# Altium PCB isa_opl2.PcbDoc
Units mm, origin at the board's own origin, x right, y up, seen from the top; angles counter-clockwise.
Board outline 104.14 x 73.66 mm, 2 copper layers (Front, Back); 61 components, 97 nets, 285 pads, 18 vias.
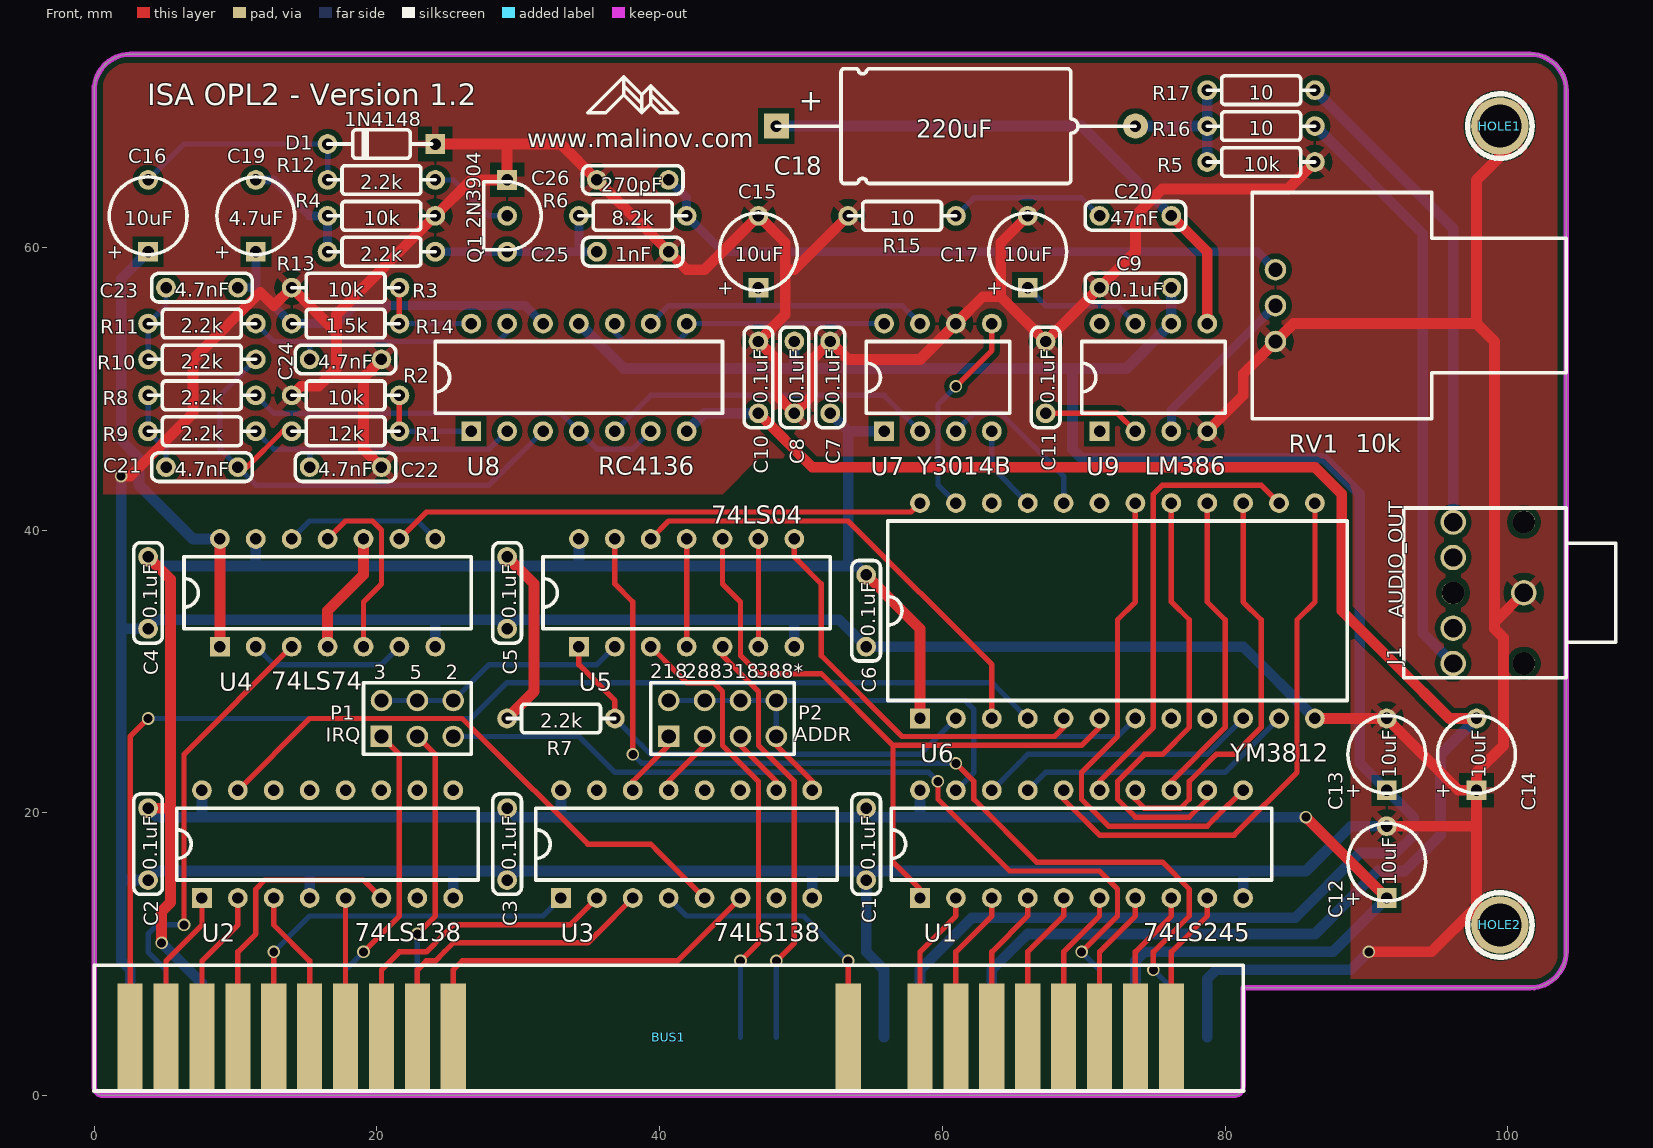
[diagram p0: Front view]
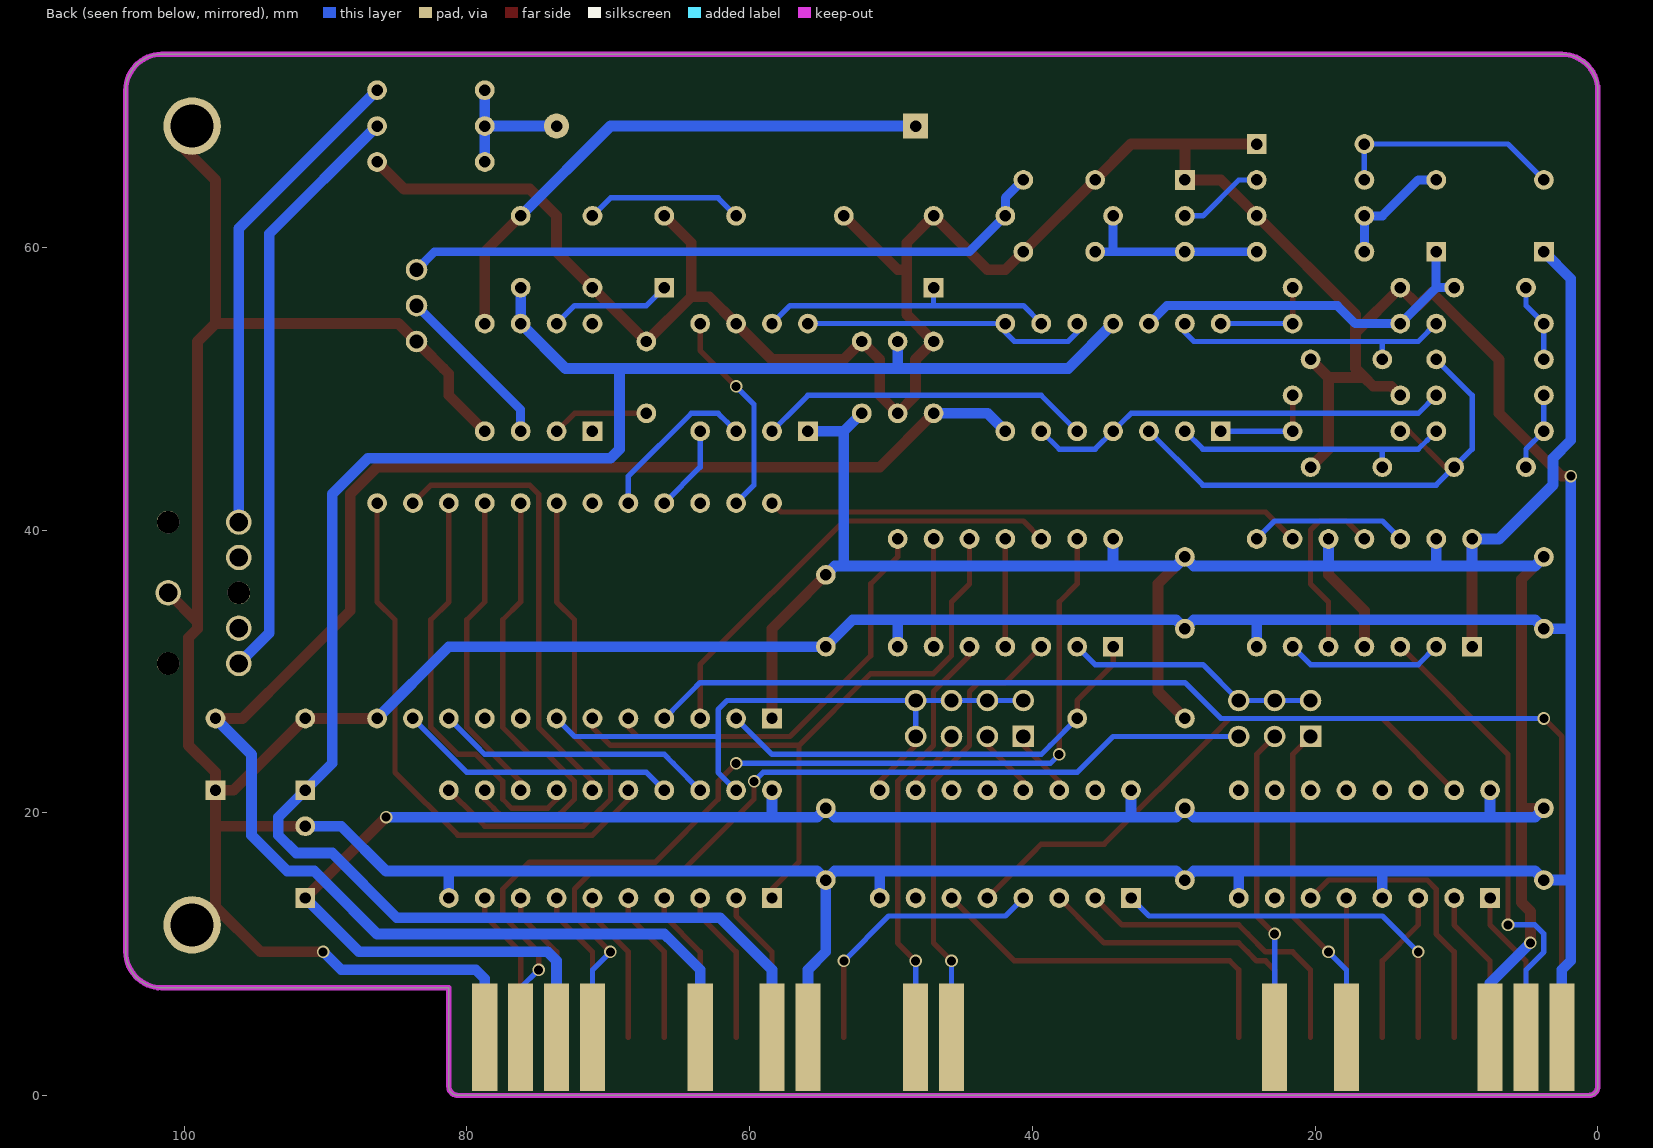
[diagram p1: Back view, seen from below]

## Layer stack, top to bottom
F.Mask: solder mask 0.0102, Solder Resist, Dk 3.5
Front: signal copper 0.0356
Dielectric 1: dielectric 0.32, FR-4, Dk 4.8
Back: signal copper 0.0356
B.Mask: solder mask 0.0102, Solder Resist, Dk 3.5

## Board outline
0,0.635 0,71.12 cw(c2.54,71.12) 2.54,73.66 101.6,73.66 cw(c101.6,71.12) 104.14,71.12 104.14,10.16 cw(c101.6,10.16) 101.6,7.62 81.28,7.62 81.28,0.635 cw(c80.645,0.635) 80.645,0 0.635,0 cw(c0.635,0.635) 0,0.635

## Design rules (kind name [scope] priority, off if disabled: settings)
Clearance "Clearence 0.37846_Polygon" [InNamedPolygon('Front-GND')] p1: gap=0.378 ignorepadtopadclearanceinfootprint=FALSE
Clearance "Clearence 0.254_NetClass" [InNetClass('Default') OR InNetClass('Audio') OR InNetClass('Power') OR InNetClass('PwrAudio')] p2: gap=0.254 ignorepadtopadclearanceinfootprint=FALSE
HoleSize "Hole Size (Default)" [All] p1: absolutevalues=TRUE maxlimit=10 minlimit=0.508 maxpercent=80.000 minpercent=20.000
MinimumSolderMaskSliver [All] p1: minsoldermaskwidth=0
PolygonConnect Polygon_Front-GND_ConnectDirect [IsNamedPolygon('Front-GND') vs IsVia] p1: connectstyle=Direct reliefconductorwidth=0.254 reliefentries=4 polygonreliefangle="90 Angle" airgapwidth=0.254
PolygonConnect Polygon_Front-GND_ConnectRelief45 [IsNamedPolygon('Front-GND') vs (IsThruPin or IsSMTPin) and (PadShape_AllLayers = 'Round')] p2: connectstyle=Relief reliefconductorwidth=0.508 reliefentries=4 polygonreliefangle="45 Angle" airgapwidth=0.508
PolygonConnect Polygon_Front-GND_ConnectRelief90 [IsNamedPolygon('Front-GND') vs (IsThruPin or IsSMTPin) and (PadShape_AllLayers <> 'Round')] p3: connectstyle=Relief reliefconductorwidth=0.508 reliefentries=4 polygonreliefangle="90 Angle" airgapwidth=0.508
RoutingVias [All] p1: holewidth=0.711 width=1.27 viastyle="Through Hole" minholewidth=0.711 minwidth=1.27 maxholewidth=0.711 maxwidth=1.27
SilkToSilkClearance [All] p1: silktosilkclearance=0
SilkToSolderMaskClearance [IsPad] p1: minsilkscreentomaskgap=0 clearancetoexposedcopper=TRUE
SolderMaskExpansion [All] p1: expansion=0.102 istentingtop=FALSE
Width [All] p1: maxlimit=10 minlimit=0.203 preferedwidth=0.378 minimp=50.000000 maximp=50.000000 favimp=50.000000
26 further rules are at their usual default settings.

## Classes and differential pairs
net class PwrAudio: AMP_OUT AUDIO_OUT LEFT RIGHT
net class Power: GND VCC VDD VSS
net class Audio: AMP_IN FILTER_OUT RC1 RC2 RC3
net class Default: 0x218 0x288 0x318 0x388 A0 A1 A2 A3 A4 A5 A6 A7 A8 A9 AEN D0 D1 D2 D3 D4 D5 D6 D7 DAC_CLK DAC_DATA DAC_SYNC DB0 DB1 DB2 DB3 DB4 DB5 DB6 DB7 I\O\R\ I\O\W\ I\R\Q\ IRQ IRQ2 IRQ3 IRQ5 MCLK Net-(C11-Pad1) Net-(C15-Pad1) Net-(C16-Pad2) Net-(C17-Pad1) Net-(C20-Pad2) Net-(C21-Pad1) Net-(C21-Pad2) Net-(C22-Pad1) Net-(C23-Pad1) Net-(C24-Pad1) Net-(J1-Pad3) Net-(J1-Pad4) Net-(Q1-Pad2) Net-(R1-Pad2) Net-(R8-Pad2) Net-(R14-Pad2) Net-(U2-Pad7) Net-(U2-Pad9) Net-(U2-Pad10) Net-(U2-Pad11) Net-(U2-Pad12) Net-(U2-Pad13) Net-(U2-Pad14) Net-(U2-Pad15) Net-(U3-Pad7) Net-(U3-Pad11) Net-(U3-Pad12) Net-(U3-Pad15) Net-(U4-Pad2) Net-(U4-Pad11) Net-(U4-Pad12) Net-(U5-Pad6) Net-(U5-Pad11) Net-(U7-Pad2) Net-(U7-Pad8) Net-(U9-Pad1) Net-(U9-Pad8) OSC R\E\A\D\ R\E\S\E\T\ RESET W\R\I\T\E\

## Components (designator, comment, footprint, x,y, rotation, side; value= is the part's Value field where it differs from the comment)
BUS1 "BUSPC" BUS_PC 40.64,4.127 r0 top
C1 "0.1uF" Cap_Cer_504 54.61,17.78 r270 top
C2 "0.1uF" Cap_Cer_504 3.81,17.78 r270 top
C3 "0.1uF" Cap_Cer_504 29.21,17.78 r270 top
C4 "0.1uF" Cap_Cer_504 3.81,35.56 r270 top
C5 "0.1uF" Cap_Cer_504 29.21,35.56 r270 top
C6 "0.1uF" Cap_Cer_504 54.61,34.29 r270 top
C7 "0.1uF" Cap_Cer_504 52.07,50.8 r90 top
C8 "0.1uF" Cap_Cer_504 49.53,50.8 r270 top
C9 "0.1uF" Cap_Cer_504 73.66,57.15 r180 top
C10 "0.1uF" Cap_Cer_504 46.99,50.8 r270 top
C11 "0.1uF" Cap_Cer_504 67.31,50.8 r90 top
C12 "10uF" Cap_Tant_504 91.44,16.51 r90 top
C13 "10uF" Cap_Tant_504 91.44,24.13 r90 top
C14 "10uF" Cap_Tant_504 97.79,24.13 r90 top
C15 "10uF" Cap_Tant_504 46.99,59.69 r90 top
C16 "10uF" Cap_Tant_504 3.81,62.23 r90 top
C17 "10uF" Cap_Tant_504 66.04,59.69 r90 top
C18 "220uF" Cap_Elec_Axial_254 60.96,68.58 r0 top
C19 "4.7uF" Cap_Tant_504 11.43,62.23 r90 top
C20 "47nF" Cap_Cer_504 73.66,62.23 r180 top
C21 "4.7nF" Cap_Cer_504 7.62,44.45 r0 top
C22 "4.7nF" Cap_Cer_504 17.78,44.45 r0 top
C23 "4.7nF" Cap_Cer_504 7.62,57.15 r0 top
C24 "4.7nF" Cap_Cer_504 17.78,52.07 r0 top
C25 "1nF" Cap_Cer_504 38.1,59.69 r180 top
C26 "270pF" Cap_Cer_504 38.1,64.77 r180 top
D1 "1N4148" Diode_762 20.32,67.31 r180 top
HOLE1 "CONN_1" HOLE_3MM 99.441,68.58 r0 top
HOLE2 "CONN_1" HOLE_3MM 99.441,12.065 r0 top
J1 "AUDIO_OUT" PHONE3_5_STEREO 104.14,35.56 r270 top
P1 "IRQ" Pin_Array_3X2 22.86,26.67 r0 top
P2 "ADDR" Pin_Array_4X2 44.45,26.67 r0 top
Q1 "2N3904" TO92_EBC_254 29.21,62.23 r270 top
R1 "12k" Res_762 17.78,46.99 r0 top
R2 "10k" Res_762 17.78,49.53 r0 top
R3 "10k" Res_762 17.78,57.15 r0 top
R4 "10k" Res_762 20.32,62.23 r0 top
R5 "10k" Res_762 82.55,66.04 r0 top
R6 "8.2k" Res_762 38.1,62.23 r180 top
R7 "2.2k" Res_762 33.02,26.67 r0 top
R8 "2.2k" Res_762 7.62,49.53 r0 top
R9 "2.2k" Res_762 7.62,46.99 r180 top
R10 "2.2k" Res_762 7.62,52.07 r0 top
R11 "2.2k" Res_762 7.62,54.61 r180 top
R12 "2.2k" Res_762 20.32,64.77 r180 top
R13 "2.2k" Res_762 20.32,59.69 r180 top
R14 "1.5k" Res_762 17.78,54.61 r0 top
R15 "10" Res_762 57.15,62.23 r180 top
R16 "10" Res_762 82.55,68.58 r180 top
R17 "10" Res_762 82.55,71.12 r180 top
RV1 "10k" BOURNS91A1 94.615,55.88 r0 top
U1 "74LS245" DIP20_300 69.85,17.78 r0 top
U2 "74LS138" DIP16_300 16.51,17.78 r0 top
U3 "74LS138" DIP16_300 41.91,17.78 r0 top
U4 "74LS74" DIP14_300 16.51,35.56 r0 top
U5 "74LS04" DIP14_300 41.91,35.56 r0 top
U6 "YM3812" DIP24_600 72.39,34.29 r0 top
U7 "Y3014B" DIP8_300 59.69,50.8 r0 top
U8 "RC4136" DIP14_300 34.29,50.8 r0 top
U9 "LM386" DIP8_300 74.93,50.8 r0 top

## Footprints (in the part's own frame and the unit in brackets; to place one, negate y for a bottom-side part, rotate by r counter-clockwise, add the part's x,y. Pads: shape width x height; smd on the part's side, far side on the other; paste and mask are expansions set on the pad)
BOURNS91A1 [mil]
  round 60 hole 40 paste-60 mask+0: 1(-435,-100) 2(-435,0) 3(-435,100)
  silkscreen extent -500,-315 375,315
BUS_PC [mil]
  rect 70x300 smd far side paste-300 mask+0: 1(1500,0) 2(1400,0) 3(1300,0) 4(1200,0) 7(900,0) 9(700,0) 10(600,0) 13(300,0) 14(200,0) 23(-700,0) 25(-900,0) 29(-1300,0) 30(-1400,0) 31(-1500,0)
  rect 70x300 smd paste-300 mask+0: 33(1400,0) 34(1300,0) 35(1200,0) 36(1100,0) 37(1000,0) 38(900,0) 39(800,0) 40(700,0) 42(500,0) 53(-600,0) 54(-700,0) 55(-800,0) 56(-900,0) 57(-1000,0) 58(-1100,0) 59(-1200,0) 60(-1300,0) 61(-1400,0) 62(-1500,0)
  silkscreen extent -1600,-150 1600,200
Cap_Cer_504 [mil]
  round 55 hole 32 paste-55 mask+0: 1(-100,0) 2(100,0)
  silkscreen extent -140,-40 140,40
Cap_Elec_Axial_254 [mil]
  rect 70x70 hole 32 paste-70 mask+0: 1(-500,0)
  round 70 hole 32 paste-70 mask+0: 2(500,0)
  silkscreen extent -500,-160 500,160
Cap_Tant_504 [mil]
  rect 55x55 hole 32 paste-55 mask+0: 1(-100,0)
  round 55 hole 32 paste-55 mask+0: 2(100,0)
  silkscreen extent -108,-108 108,108
Diode_762 [mil]
  rect 55x55 hole 32 paste-55 mask+0: 1(-150,0)
  round 55 hole 32 paste-55 mask+0: 2(150,0)
  silkscreen extent -140,-40 150,40
DIP8_300 [mil]
  rect 55x55 hole 32 paste-55 mask+0: 1(-150,-150)
  round 55 hole 32 paste-55 mask+0: 2(-50,-150) 3(50,-150) 4(150,-150) 5(150,150) 6(50,150) 7(-50,150) 8(-150,150)
  silkscreen extent -200,-100 200,100
DIP14_300 [mil]
  rect 55x55 hole 32 paste-55 mask+0: 1(-300,-150)
  round 55 hole 32 paste-55 mask+0: 2(-200,-150) 3(-100,-150) 4(0,-150) 5(100,-150) 6(200,-150) 7(300,-150) 8(300,150) 9(200,150) 10(100,150) 11(0,150) 12(-100,150) 13(-200,150) 14(-300,150)
  silkscreen extent -400,-100 400,100
DIP16_300 [mil]
  rect 55x55 hole 32 paste-55 mask+0: 1(-350,-150)
  round 55 hole 32 paste-55 mask+0: 2(-250,-150) 3(-150,-150) 4(-50,-150) 5(50,-150) 6(150,-150) 7(250,-150) 8(350,-150) 9(350,150) 10(250,150) 11(150,150) 12(50,150) 13(-50,150) 14(-150,150) 15(-250,150) 16(-350,150)
  silkscreen extent -420,-100 420,100
DIP20_300 [mil]
  rect 55x55 hole 32 paste-55 mask+0: 1(-450,-150)
  round 55 hole 32 paste-55 mask+0: 2(-350,-150) 3(-250,-150) 4(-150,-150) 5(-50,-150) 6(50,-150) 7(150,-150) 8(250,-150) 9(350,-150) 10(450,-150) 11(450,150) 12(350,150) 13(250,150) 14(150,150) 15(50,150) 16(-50,150) 17(-150,150) 18(-250,150) 19(-350,150) 20(-450,150)
  silkscreen extent -530,-100 530,100
DIP24_600 [mil]
  rect 55x55 hole 32 paste-55 mask+0: 1(-550,-300)
  round 55 hole 32 paste-55 mask+0: 2(-450,-300) 3(-350,-300) 4(-250,-300) 5(-150,-300) 6(-50,-300) 7(50,-300) 8(150,-300) 9(250,-300) 10(350,-300) 11(450,-300) 12(550,-300) 13(550,300) 14(450,300) 15(350,300) 16(250,300) 17(150,300) 18(50,300) 19(-50,300) 20(-150,300) 21(-250,300) 22(-350,300) 23(-450,300) 24(-550,300)
  silkscreen extent -640,-250 640,250
HOLE_3MM [mil]
  round 160 hole 120 paste-160 mask+0: 1(0,0)
  silkscreen extent -90,-90 90,90
PHONE3_5_STEREO [mil]
  round 70.9 hole 51.2 paste-70.9 mask+0: 1(0,-118.1) 2(-196.9,-315) 3(-98.4,-315) 4(98.4,-315) 5(196.9,-315)
  round 63 hole 63 paste-63 mask+0: Un1(0,-315) Un2(-196.9,-118.1) Un3(196.9,-118.1)
  silkscreen extent -236,-453 236,138
Pin_Array_3X2 [mil]
  rect 60x60 hole 40 paste-60 mask+0: 1(-100,-50)
  round 60 hole 40 paste-60 mask+0: 2(-100,50) 3(0,-50) 4(0,50) 5(100,-50) 6(100,50)
  silkscreen extent -150,-100 150,100
Pin_Array_4X2 [mil]
  rect 60x60 hole 40 paste-60 mask+0: 1(-150,-50)
  round 60 hole 40 paste-60 mask+0: 2(-150,50) 3(-50,-50) 4(-50,50) 5(50,-50) 6(50,50) 7(150,-50) 8(150,50)
  silkscreen extent -200,-100 200,100
Res_762 [mil]
  round 55 hole 32 paste-55 mask+0: 1(-150,0) 2(150,0)
  silkscreen extent -150,-40 150,40
TO92_EBC_254 [mil]
  rect 55x55 hole 32 paste-55 mask+0: 1(-100,0)
  round 55 hole 32 paste-55 mask+0: 2(0,0) 3(100,0)
  silkscreen extent -95,-65 95,95

## Part data
BUS1: library part BUS_PC, "Connecteur Bus AT ISA 16 bits"
C1 C2 C3 C4 C5 C6 C7 C8 C9 C10 C11 C20 C21 C22 C23 C24 C25 C26: library part Cap_Cer_504, "Ceramic Capacitor 5.04mm"
C12 C13 C14 C15 C16 C17 C19: library part Cap_Tant_504, "Tantalum Capacitor - 5.04mm"
C18: library part Cap_Elec_Axial_254, "Condensateur polarise"
D1: library part Diode_762, "Diode 7.62mm"
HOLE1 HOLE2: library part HOLE_3MM, "module 1 pin (ou trou mecanique de percage)"
J1: library part PHONE3_5_STEREO
P1: library part Pin_Array_3X2, "Double rangee de contacts 2 x 4 pins"
P2: library part Pin_Array_4X2, "Pin Array 4x2 pins 2.54mm"
Q1: library part TO92_EBC_254, "Transistor TO92"
R1 R2 R3 R4 R5 R6 R7 R8 R9 R10 R11 R12 R13 R14 R15 R16 R17: library part Res_762, "Resitance 3 pas"
RV1: library part BOURNS91A1
U1: library part DIP20_300, "20 pins DIL package, round pads"
U2 U3: library part DIP16_300, "16 pins DIL package, round pads"
U4 U5 U8: library part DIP14_300, "14 pins DIL package, round pads"
U6: library part DIP24_600, "28 pins DIL package, round pads, width 600mil"
U7 U9: library part DIP8_300, "8 pins DIL package, round pads"

## Via types
v1: diameter 0.889, hole 0.635, Front to Back, tented both sides, 18 vias

## Nets (pads, with @x,y where several pads share a name; then routed paths per layer and width w, separated by ;. In a path a pad name is that pad's centre, name@x,y a point inside that pad or via, vN(x,y) a via of type N, cw(c..) or ccw(c..) an arc to the next point about the centre after c; other vN are vias at no path point)
0x218: P2.1 U3.14 | length 4.9
  Front w0.378: U3.14 38.1,22.225 40.64,24.765 P2.1
0x288: P2.3 U3.13 | length 4.9
  Front w0.378: U3.13 40.64,22.225 43.18,24.765 P2.3
0x318: P2.5 U3.10 | length 4.9
  Front w0.378: P2.5 45.72,24.765 48.26,22.225 U3.10
0x388: P2.2 P2.4 P2.6 P2.7 P2.8 U1.19 U3.9 U6.7 | length 47.5
  Front w0.378: P2.7 48.26,24.765 50.8,22.225 U3.9
  Back w0.378: P2.2 P2.4 P2.6 P2.8 ; P2.7 P2.8 ; U1.19 62.23,22.86 62.23,23.495 62.23,25.4 ; U6.7 72.39,25.4 62.23,25.4 ; P2.8 61.595,27.94 62.23,27.305 62.23,25.4
A0: BUS1.62 U6.4 | length 87.4
  Front w0.378: BUS1.62 2.54,25.4 v1(3.81,26.67)
  Back w0.378: v1(3.81,26.67) 19.685,26.67 26.035,26.67 26.67,26.67 29.21,29.21 63.5,29.21 64.135,28.575 64.77,27.94 U6.4
A1: BUS1.61 U2.1 | length 10.9
  Front w0.378: BUS1.61 5.08,9.525 7.62,12.065 U2.1
A2: BUS1.60 U2.2 | length 10.9
  Front w0.378: BUS1.60 7.62,9.525 10.16,12.065 U2.2
A3: BUS1.59 U2.6 | length 20.7
  Front w0.378: BUS1.59 10.16,10.16 11.43,11.43 11.43,14.605 12.065,15.24 19.05,15.24 19.685,14.605 U2.6
A4: BUS1.58 U3.1 | length 27.9
  Front w0.378: BUS1.58 v1(12.7,10.16)
  Back w0.378: v1(12.7,10.16) 14.605,12.065 15.24,12.7 31.75,12.7 U3.1
A5: BUS1.57 U2.3 | length 10.9
  Front w0.378: U2.3 12.7,12.065 15.24,9.525 BUS1.57
A6: BUS1.56 U2.5 | length 9.8
  Front w0.378: BUS1.56 U2.5
A7: BUS1.55 U3.2 | length 22.1
  Front w0.378: BUS1.55 20.32,8.89 21.59,10.16 23.495,10.16 24.765,11.43 25.4,12.065 33.655,12.065 U3.2
A8: BUS1.54 U3.3 | length 22.1
  Front w0.378: BUS1.54 22.86,8.255 22.86,8.89 23.495,9.525 24.13,9.525 24.765,10.16 25.4,10.795 34.925,10.795 35.56,11.43 U3.3
A9: BUS1.53 U3.6 | length 27.2
  Front w0.378: BUS1.53 25.4,8.89 26.035,9.525 41.275,9.525 U3.6
AEN: BUS1.42 U3.4 | length 19.9
  Front w0.378: BUS1.42 v1(53.34,9.525)
  Back w0.378: U3.4 41.91,12.7 50.165,12.7 v1(53.34,9.525)
AMP_IN: RV1.2 U9.3 | length 11.9
  Back w0.632: U9.3 76.2,48.514 RV1.2
AMP_OUT: C18.1 C20.1 U9.5 | length 39.2
  Front w0.759: C20.1 78.74,59.69 U9.5
  Back w0.759: C18.1 69.85,68.58 C20.1
AUDIO_OUT: C18.2 R5.1 R16.2 R17.2 | length 10.2
  Back w0.759: C18.2 R16.2 ; R5.1 R16.2 ; R17.2 R16.2
D0: BUS1.40 U1.2 | length 10.9
  Front w0.378: BUS1.40 58.42,10.16 60.96,12.7 U1.2
D1: BUS1.39 U1.3 | length 10.9
  Front w0.378: BUS1.39 60.96,10.16 63.5,12.7 U1.3
D2: BUS1.38 U1.4 | length 10.9
  Front w0.378: BUS1.38 63.5,10.16 66.04,12.7 U1.4
D3: BUS1.37 U1.5 | length 10.9
  Front w0.378: BUS1.37 66.04,10.16 68.58,12.7 U1.5
D4: BUS1.36 U1.6 | length 10.9
  Front w0.378: BUS1.36 68.58,10.16 71.12,12.7 U1.6
D5: BUS1.35 U1.7 | length 10.9
  Front w0.378: BUS1.35 71.12,10.16 73.66,12.7 U1.7
D6: BUS1.34 U1.8 | length 10.9
  Front w0.378: BUS1.34 73.66,10.16 76.2,12.7 U1.8
D7: BUS1.33 U1.9 | length 14.4
  Front w0.378: BUS1.33@76.2,7.62 BUS1.33 76.2,10.16 78.74,12.7 U1.9
DAC_CLK: U6.23 U7.5 | length 14.8
  Front w0.378: v1(60.96,50.165) 63.5,52.705 63.5,53.34 U7.5
  Back w0.378: U6.23 59.69,43.18 59.69,45.085 59.69,48.26 59.69,48.895 v1(60.96,50.165)
DAC_DATA: U6.21 U7.4 | length 6.1
  Back w0.378: U7.4 63.5,46.355 63.5,44.45 U6.21
DAC_SYNC: U6.20 U7.3 | length 11.9
  Back w0.378: U7.3 61.595,47.625 62.23,48.26 64.135,48.26 68.58,43.815 U6.20
DB0: U1.18 U6.10 | length 19.9
  Back w0.378: U1.18 65.405,23.495 66.04,24.13 78.74,24.13 79.375,24.765 U6.10
DB1: U1.17 U6.11 | length 19.9
  Back w0.378: U1.17 67.31,22.86 80.01,22.86 80.645,23.495 U6.11
DB2: U1.16 U6.13 | length 39.6
  Front w0.378: U1.16 68.58,20.955 71.12,18.415 80.645,18.415 85.09,22.86 85.09,33.655 86.36,34.925 U6.13
DB3: U1.15 U6.14 | length 32.2
  Front w0.378: U1.15 71.12,22.225 74.93,26.035 74.93,42.545 75.565,43.18 82.55,43.18 83.185,42.545 U6.14
DB4: U1.14 U6.15 | length 29.3
  Front w0.378: U1.14 73.66,20.955 74.295,20.32 76.835,20.32 77.47,20.955 77.47,22.225 79.375,24.13 80.645,24.13 82.55,26.035 82.55,33.655 81.28,34.925 U6.15
DB5: U1.13 U6.16 | length 22.4
  Front w0.378: U1.13 76.2,22.225 80.01,26.035 80.01,33.655 78.74,34.925 U6.16
DB6: U1.12 U6.17 | length 32.4
  Front w0.378: U6.17 76.2,34.925 77.47,33.655 77.47,26.035 75.565,24.13 74.295,24.13 72.39,22.225 72.39,20.955 73.025,20.32 73.66,19.685 77.47,19.685 78.105,20.32 78.74,20.955 U1.12
DB7: U1.11 U6.18 | length 35.8
  Front w0.378: U6.18 73.66,34.925 72.39,33.655 72.39,25.4 69.85,22.86 69.85,20.955 71.12,19.685 71.755,19.05 78.735,19.05 78.735,19.055 78.74,19.055 79.37,19.685 79.375,19.685 U1.11
FILTER_OUT: C19.1 C23.2 R14.1 U8.12 | length 26.2
  Back w0.632: C23.2 11.43,57.15 ; C19.1 11.43,57.15 ; U8.12 30.48,55.88 18.415,55.88 17.145,54.61 R14.1 11.43,57.15
GND: BUS1.1 BUS1.10 BUS1.31 C1.2 C2.2 C3.2 C4.2 C5.2 C6.2 C7.2 C8.2 C9.2 C10.1 C11.2 C12.2 C13.2 C14.1 C15.2 C17.2 C22.2 C24.2 C25.1 C26.2 D1.1 HOLE1.1 HOLE2.1 J1.1 Q1.1 R2.1 R3.1 R4.2 R5.2 R15.2 RV1.1 U1.10 U2.4 U2.8 U3.8 U4.7 U5.7 U6.12 U7.6 U9.4 | length 546.7
  Front w0.759: v1(1.905,43.815) 2.54,43.815 6.985,48.26 6.985,52.07 11.747,56.832 12.7,55.88 R3.1 17.145,53.975 ; R2.1 14.605,50.165 15.875,50.165 16.51,50.8 ; C22.2 19.05,45.72 19.05,49.53 19.05,50.8 ; C24.2 19.05,50.8 ; D1.1 29.21,67.31 ; R15.2 49.53,58.42 48.895,58.42 ; C17.2 64.135,60.325 64.135,56.515 ; U9.4 81.28,49.53 81.28,51.054 RV1.1 84.836,54.61 97.79,54.61 ; 81.661,51.435 81.788,51.562 ; U6.12 C13.2 95.885,22.225 96.52,21.59 C14.1 ; R5.2 84.455,64.135 75.565,64.135 73.66,62.23 73.66,59.69 C9.2 C11.2 64.135,56.515 ; v1(90.17,10.16) 94.615,10.16 97.79,13.335 ; C12.2 97.79,19.05 97.79,19.685 ; HOLE2.1@100.33,10.795 97.79,13.335 ; HOLE1.1@100.33,67.31 97.79,64.77 97.79,54.61 ; J1.1 99.06,33.48 99.06,33.02 ; 16.51,50.8 17.145,51.435 17.145,53.975 ; 16.51,50.8 19.05,50.8 ; 17.145,53.975 17.145,55.245 R4.2 26.67,64.77 Q1.1 29.21,67.31 ; 29.21,67.31 33.02,67.31 C26.2 C25.1 41.91,58.42 43.18,58.42 C15.2 48.895,60.325 48.895,58.42 ; 48.895,58.42 48.895,55.245 C10.1 48.26,52.07 48.26,49.53 C8.2 50.8,49.53 50.8,52.07 C7.2 53.34,52.07 58.42,52.07 U7.6 62.865,56.515 64.135,56.515 ; 97.79,13.335 97.79,19.685 ; 97.79,19.685 C14.1 ; C14.1 97.79,22.86 99.695,24.765 99.695,32.385 99.06,33.02 ; 97.79,54.61 99.06,53.34 99.06,52.07 99.06,33.02
  Back w0.759: v1(1.905,43.815) 1.905,33.02 ; BUS1.31 2.54,8.89 1.905,9.525 1.905,15.24 ; U2.4 15.24,15.875 ; U4.7 24.13,33.655 ; U2.8 25.4,15.875 ; U5.7 49.53,33.655 ; U3.8 50.8,15.875 ; BUS1.10 55.88,8.89 54.61,10.16 C1.2 ; BUS1.1 78.74,8.255 79.375,8.89 88.265,8.89 88.9,8.89 v1(90.17,10.16) ; U1.10 81.28,15.875 ; U6.12 81.28,31.75 C6.2 52.705,33.655 49.53,33.655 ; C12.2 88.9,19.05 85.725,15.875 81.28,15.875 ; 1.905,15.24 C2.2 4.445,15.875 15.24,15.875 ; 1.905,15.24 1.905,33.02 ; 1.905,33.02 C4.2 4.445,33.655 24.13,33.655 ; 15.24,15.875 25.4,15.875 ; 24.13,33.655 28.575,33.655 C5.2 29.845,33.655 49.53,33.655 ; 25.4,15.875 28.575,15.875 C3.2 29.845,15.875 50.8,15.875 ; 50.8,15.875 53.975,15.875 C1.2 ; C1.2 55.245,15.875 81.28,15.875
I\O\R\: BUS1.14 U5.3 | length 32.4
  Front w0.378: U5.3 41.275,29.845 41.91,29.21 43.815,29.21 44.45,28.575 44.45,24.765 46.99,22.225 46.99,16.51 46.99,10.795 v1(45.72,9.525)
  Back w0.378: BUS1.14 v1(45.72,9.525)
I\O\W\: BUS1.13 U5.5 | length 30.3
  Front w0.378: U5.5 44.45,31.115 46.99,28.575 46.99,24.765 49.53,22.225 49.53,10.795 v1(48.26,9.525)
  Back w0.378: BUS1.13 v1(48.26,9.525)
I\R\Q\: R7.2 U5.1 U6.2 | length 32.4
  Front w0.378: U5.1 34.29,30.48 36.83,27.94 R7.2
  Back w0.378: R7.2 38.735,24.765 39.37,24.13 58.415,24.13 58.42,24.135 58.42,24.13 U6.2
IRQ: P1.2 P1.4 P1.6 U5.2 | length 18.1
  Back w0.378: P1.2 P1.4 P1.6 27.94,30.48 28.575,30.48 35.56,30.48 U5.2
IRQ2: BUS1.4 P1.5 | length 64.3
  Front w0.378: v1(59.69,22.225) 59.69,20.955 64.77,15.875 71.12,15.875 72.39,14.605 72.39,12.7 v1(69.85,10.16)
  Back w0.378: P1.5 33.02,25.4 34.29,25.4 36.83,22.86 40.64,22.86 59.055,22.86 v1(59.69,22.225) ; v1(69.85,10.16) 71.12,8.89 BUS1.4
IRQ3: BUS1.25 P1.1 | length 23.4
  Front w0.378: v1(19.05,10.16) 21.59,12.7 21.59,23.495 21.59,24.13 P1.1
  Back w0.378: BUS1.25 17.78,8.89 v1(19.05,10.16)
IRQ5: BUS1.23 P1.3 | length 22.3
  Front w0.378: v1(22.86,11.43) 24.13,12.7 24.13,23.495 24.13,24.13 P1.3
  Back w0.378: BUS1.23 22.86,10.16 v1(22.86,11.43)
LEFT: J1.5 R16.1 | length 42.1
  Back w0.759: R16.1 93.98,60.96 93.98,60.325 93.98,53.34 93.98,33.02 93.98,32.718 J1.5
MCLK: U4.9 U6.24 | length 37.9
  Front w0.378: U4.9 23.495,41.275 57.15,41.275 57.785,41.275 U6.24
Net-(C11-Pad1): C11.1 U9.2 | length 6.9
  Front w0.378: C11.1 72.39,48.26 U9.2
Net-(C15-Pad1): C15.1 U7.7 U8.9 | length 25
  Back w0.378: C15.1 46.99,55.88 ; U7.7 57.785,55.245 57.15,55.88 46.99,55.88 ; U8.9 40.64,55.88 ; U8.9 40.64,55.88 ; U8.9 40.64,55.88 ; 40.64,55.88 46.99,55.88
Net-(C16-Pad2): C16.2 D1.2 R12.2 | length 16.3
  Back w0.378: C16.2 6.35,67.31 D1.2 R12.2
Net-(C17-Pad1): C17.1 U9.7 | length 8.7
  Back w0.378: C17.1 67.31,55.88 72.39,55.88 U9.7
Net-(C20-Pad2): C20.2 R15.1 | length 11.2
  Back w0.378: R15.1 62.23,63.5 69.85,63.5 C20.2
Net-(C21-Pad1): C21.1 R8.1 R9.2 | length 5.6
  Back w0.378: R8.1 R9.2 5.08,45.72 C21.1
Net-(C21-Pad2): C21.2 R1.1 R10.2 U8.3 | length 37.8
  Front w0.378: C21.2 10.795,44.45 13.335,46.99 R1.1
  Back w0.378: R10.2 8.89,49.53 8.89,48.26 8.89,45.72 C21.2 11.43,43.18 12.065,43.18 27.94,43.18 U8.3
Net-(C22-Pad1): C22.1 R9.1 U8.2 | length 20.1
  Back w0.378: R9.1 12.065,46.355 12.7,45.72 15.24,45.72 ; C22.1 15.24,45.72 ; U8.2 27.94,45.72 15.24,45.72
Net-(C23-Pad1): C23.1 R10.1 R11.2 | length 5.6
  Back w0.378: R10.1 R11.2 5.08,55.88 C23.1
Net-(C24-Pad1): C24.1 R11.1 U8.13 | length 20.5
  Back w0.378: R11.1 12.7,53.34 15.24,53.34 ; C24.1 15.24,53.34 ; U8.13 29.21,53.975 28.575,53.34 15.24,53.34
Net-(J1-Pad3): J1.3
Net-(J1-Pad4): J1.4
Net-(Q1-Pad2): Q1.2 R12.1 | length 6.1
  Back w0.378: R12.1 25.4,64.77 27.94,62.23 Q1.2
Net-(R1-Pad2): R1.2 R2.2 U8.1 | length 7.6
  Front w0.378: R1.2 R2.2
  Back w0.378: R1.2 U8.1
Net-(R8-Pad2): R8.2 U8.4 U8.6 | length 30
  Back w0.378: R8.2 12.7,48.26 13.335,48.26 33.02,48.26 33.655,47.625 U8.4 35.56,45.72 38.1,45.72 U8.6
Net-(R14-Pad2): R3.2 R14.2 U8.14 | length 7.6
  Front w0.378: R14.2 R3.2
  Back w0.378: R14.2 U8.14
Net-(U2-Pad7): U2.7
Net-(U2-Pad9): U2.9
Net-(U2-Pad10): U2.10
Net-(U2-Pad11): U2.11
Net-(U2-Pad12): U2.12
Net-(U2-Pad13): U2.13
Net-(U2-Pad14): U2.14
Net-(U2-Pad15): U2.15 U3.5 | length 40.4
  Front w0.378: U2.15 15.24,26.67 26.035,26.67 27.305,25.4 34.925,17.78 36.195,17.78 39.37,17.78 40.005,17.145 U3.5
Net-(U3-Pad7): U3.7
Net-(U3-Pad11): U3.11
Net-(U3-Pad12): U3.12
Net-(U3-Pad15): U3.15
Net-(U4-Pad2): U4.2 U4.6 | length 11.2
  Back w0.378: U4.2 12.7,30.48 20.32,30.48 20.955,31.115 U4.6
Net-(U4-Pad11): U4.5 U4.11 | length 13.4
  Front w0.378: U4.11 17.78,40.64 19.685,40.64 20.32,40.005 20.32,36.195 19.05,34.925 U4.5
Net-(U4-Pad12): U4.8 U4.12 | length 11.2
  Back w0.378: U4.12 15.24,40.64 22.86,40.64 23.495,40.005 U4.8
Net-(U5-Pad6): U5.6 U5.9 | length 7.6
  Front w0.378: U5.6 U5.9
Net-(U5-Pad11): U5.4 U5.11 | length 7.6
  Front w0.378: U5.4 U5.11
Net-(U7-Pad2): U7.2 U8.5 | length 23.7
  Back w0.378: U8.5 39.37,49.53 55.88,49.53 56.515,48.895 U7.2
Net-(U7-Pad8): U7.8 U8.8 U8.10 | length 20.8
  Back w0.378: U8.10 36.83,53.975 37.465,53.34 41.275,53.34 41.91,53.975 U8.8 U7.8
Net-(U9-Pad1): U9.1
Net-(U9-Pad8): U9.8
OSC: BUS1.30 U4.3 | length 33.5
  Front w0.378: v1(6.35,12.065) 6.35,24.13 U4.3
  Back w0.378: BUS1.30 5.08,8.89 3.81,10.16 3.81,11.43 4.445,12.065 v1(6.35,12.065)
R\E\A\D\: U1.1 U5.10 U6.6 | length 49.6
  Front w0.378: U5.10 44.45,36.195 45.72,34.925 45.72,31.115 46.99,29.845 48.895,29.845 50.8,29.845 51.435,29.845 56.515,24.765 ; U1.1 58.42,14.605 56.515,16.51 56.515,24.13 56.515,24.765 ; U6.6 71.12,26.035 69.85,24.765 56.515,24.765
R\E\S\E\T\: U5.12 U6.3 | length 32.7
  Front w0.378: U5.12 40.64,40.64 53.34,40.64 63.5,30.48 U6.3
RC1: C19.2 R4.1 R13.2 | length 8.7
  Back w0.632: C19.2 12.7,64.77 15.24,62.23 R4.1 R13.2
RC2: C25.2 Q1.3 R6.2 R13.1 | length 14
  Back w0.632: R13.1 Q1.3 34.29,59.69 ; R6.2 34.29,59.69 ; C25.2 34.29,59.69
RC3: C26.1 R6.1 RV1.3 | length 46.3
  Back w0.632: C26.1 41.91,63.5 R6.1 44.45,59.69 82.296,59.69 RV1.3
RESET: BUS1.2 U5.13 | length 75.4
  Front w0.378: U5.13 36.83,36.195 38.1,34.925 38.1,30.48 v1(38.1,24.13) ; v1(60.96,23.495) 62.23,22.225 62.23,20.955 66.675,16.51 75.565,16.51 77.47,14.605 77.47,12.7 74.93,10.16 v1(74.93,8.89)
  Back w0.378: v1(38.1,24.13) 38.735,23.495 v1(60.96,23.495) ; v1(74.93,8.89) BUS1.2@76.2,7.62 ; BUS1.2@76.2,7.62 BUS1.2 BUS1.2@76.2,7.62
RIGHT: J1.2 R17.1 | length 34.6
  Back w0.759: R17.1 96.139,61.341 96.139,60.96 96.139,53.975 J1.2
VCC: BUS1.3 BUS1.29 C1.1 C2.1 C3.1 C4.1 C5.1 C6.1 C7.1 C12.1 C16.1 R7.1 U1.20 U2.16 U3.16 U4.1 U4.4 U4.10 U4.13 U4.14 U5.14 U6.1 U7.1 | length 299.2
  Front w0.759: C2.1 5.397,20.32 ; C4.1 5.08,36.83 5.397,36.512 5.397,20.32 ; v1(4.763,10.795) 4.763,13.018 5.397,13.652 5.397,20.32 ; U4.1 U4.14 ; U4.4 16.51,34.29 19.05,36.83 U4.10 ; R7.1 30.48,27.94 31.115,28.575 31.115,36.195 C5.1 ; C6.1 57.15,34.29 58.42,33.02 U6.1 ; v1(85.725,19.685) C12.1
  Back w0.759: C2.1 4.445,19.685 7.62,19.685 ; C4.1 4.445,37.465 8.89,37.465 ; C16.1 1.905,57.785 1.905,46.355 3.175,45.085 3.175,43.18 6.985,39.37 U4.14 8.89,37.465 ; v1(4.763,10.795) 7.62,7.938 BUS1.29 ; U2.16 7.62,19.685 ; U4.13 11.43,37.465 ; U4.10 19.05,37.465 ; U3.16 33.02,19.685 ; U5.14 34.29,37.465 ; C7.1 53.34,46.99 ; C6.1 53.975,37.465 53.34,37.465 ; U7.1 53.34,46.99 ; U1.20 58.42,19.685 ; BUS1.3 73.66,8.89 73.66,9.525 74.295,10.16 74.93,10.16 87.63,10.16 C12.1 ; v1(85.725,19.685) 58.42,19.685 ; 7.62,19.685 28.575,19.685 C3.1 29.845,19.685 33.02,19.685 ; 8.89,37.465 10.795,37.465 11.43,37.465 ; 11.43,37.465 19.05,37.465 ; 19.05,37.465 28.575,37.465 C5.1 29.845,37.465 34.29,37.465 ; 33.02,19.685 53.975,19.685 C1.1 55.245,19.685 58.42,19.685 ; 34.29,37.465 53.34,37.465 ; 53.34,37.465 53.34,46.99
VDD: BUS1.9 C8.1 C9.1 C13.1 U8.11 U9.6 | length 145.7
  Back w0.759: U8.11 37.465,51.435 49.53,51.435 ; C8.1 49.53,51.435 ; BUS1.9 58.42,8.89 61.595,12.065 62.103,12.573 84.963,12.573 89.535,17.145 91.44,17.145 92.075,17.145 93.345,18.415 93.345,19.685 92.71,20.32 C13.1 90.17,22.86 89.535,23.495 89.535,42.545 86.995,45.085 69.85,45.085 69.215,45.72 69.215,51.435 ; C9.1 U9.6 73.025,51.435 69.215,51.435 ; 49.53,51.435 69.215,51.435
VSS: BUS1.7 C10.2 C14.2 U8.7 | length 119.9
  Front w0.759: C10.2 50.8,44.45 86.36,44.45 88.265,42.545 88.265,34.29 89.535,33.02 92.075,30.48 95.885,26.67 C14.2
  Back w0.759: U8.7 42.545,47.625 43.18,48.26 C10.2 ; BUS1.7 63.5,8.89 65.405,10.795 66.04,11.43 86.36,11.43 89.852,14.922 90.805,15.875 92.71,15.875 95.25,18.415 95.25,19.685 95.25,20.955 95.25,24.13 C14.2
W\R\I\T\E\: U5.8 U6.5 | length 29.5
  Front w0.378: U5.8 49.53,38.1 51.435,36.195 51.435,31.115 57.15,25.4 67.945,25.4 68.58,26.035 U6.5
pads on no net: J1.Un1 J1.Un2 J1.Un3 U6.8 U6.9 U6.19 U6.22

## Polygon pours and split planes (outlines as drawn)
GND on Front "Front-GND" (solid, remove dead copper, pour order 0): 103.505,8.255 103.505,73.025 0.635,73.025 0.635,42.545 44.45,42.545 46.99,45.085 86.995,45.085 88.9,43.18 88.9,8.255

## Keep-outs
Edge.Cuts:
  lines w0.381: 0,0.635 ccw(c0.635,0.635) 0.635,0 ; 0,0.635 ccw(c0.635,0.635) 0.635,0 ; 0,0.635 0,71.12 ; 0,0.635 0,71.12 ; 0,71.12 cw(c2.54,71.12) 2.54,73.66 ; 0,71.12 cw(c2.54,71.12) 2.54,73.66 ; 0.635,0 80.645,0 ; 0.635,0 80.645,0 ; 2.54,73.66 101.6,73.66 ; 2.54,73.66 101.6,73.66 ; 80.645,0 ccw(c80.645,0.635) 81.28,0.635 ; 80.645,0 ccw(c80.645,0.635) 81.28,0.635 ; 81.28,0.635 81.28,7.62 ; 81.28,0.635 81.28,7.62 ; 81.28,7.62 101.6,7.62 ; 81.28,7.62 101.6,7.62 ; 101.6,7.62 ccw(c101.6,10.16) 104.14,10.16 ; 101.6,7.62 ccw(c101.6,10.16) 104.14,10.16 ; 101.6,73.66 cw(c101.6,71.12) 104.14,71.12 ; 101.6,73.66 cw(c101.6,71.12) 104.14,71.12 ; 104.14,10.16 104.14,71.12 ; 104.14,10.16 104.14,71.12

## Silkscreen, mask and mechanical layers (free items; w line width, h text height)
F.SilkS:
  lines w0.254: 37.465,71.438 38.735,70.168 ; 39.37,70.802 40.64,69.532 ; 37.465,70.802 38.735,69.532 ; 37.465,70.802 36.195,69.532 34.925,69.532 37.465,72.072 ; 37.465,70.802 37.465,72.072 ; 37.465,72.072 38.735,70.802 ; 38.735,69.532 39.37,70.168 ; 38.735,69.532 38.735,70.802 ; 38.735,70.802 39.37,71.438 ; 39.37,70.168 40.005,69.532 41.275,69.532 39.37,71.438 ; 39.37,70.168 39.37,71.438
  text "ISA OPL2 - Version 1.2" at 3.736,70.068 h1.52
  text "www.malinov.com" at 30.647,67.077 h1.27
  text "218" at 39.324,29.502 h1.02
  text "288" at 41.784,29.502 h1.02
  text "318" at 44.404,29.502 h1.02
  text "388*" at 46.826,29.502 h1.02
  text "3" at 19.778,29.451 h1.02
  text "5" at 22.318,29.451 h1.02
  text "2" at 24.858,29.451 h1.02

## Text inside footprints (layer, text, board x,y; h text height)
C12: F.SilkS "+" at 89.539,13.331 h1.02 r90
C13: F.SilkS "+" at 89.539,20.951 h1.02 r90
C14: F.SilkS "+" at 95.889,20.951 h1.02 r90
C15: F.SilkS "+" at 45.089,56.511 h1.02 r90
C16: F.SilkS "+" at 1.909,59.051 h1.02 r90
C17: F.SilkS "+" at 64.139,56.511 h1.02 r90
C18: F.SilkS "+" at 49.842,69.654 h1.52
C19: F.SilkS "+" at 9.529,59.051 h1.02 r90